# EAGLE board UniversalBoardBreakout (EAGLE 8.5.1)
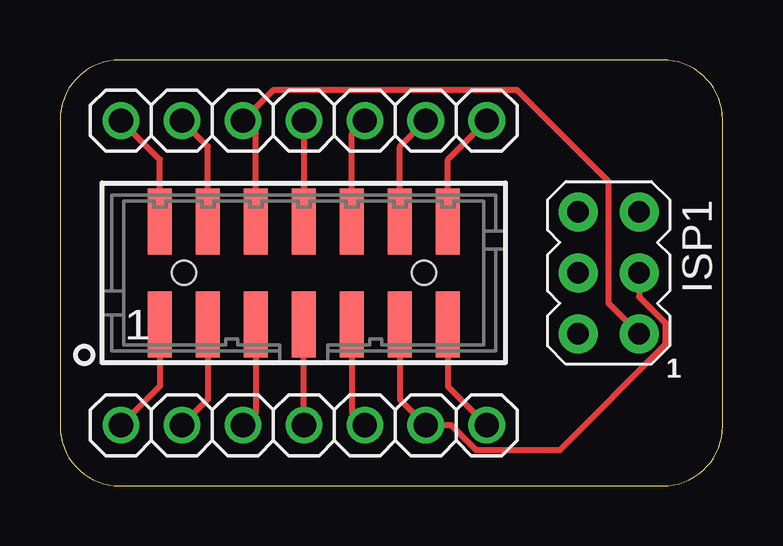
[diagram p0: board, top side]
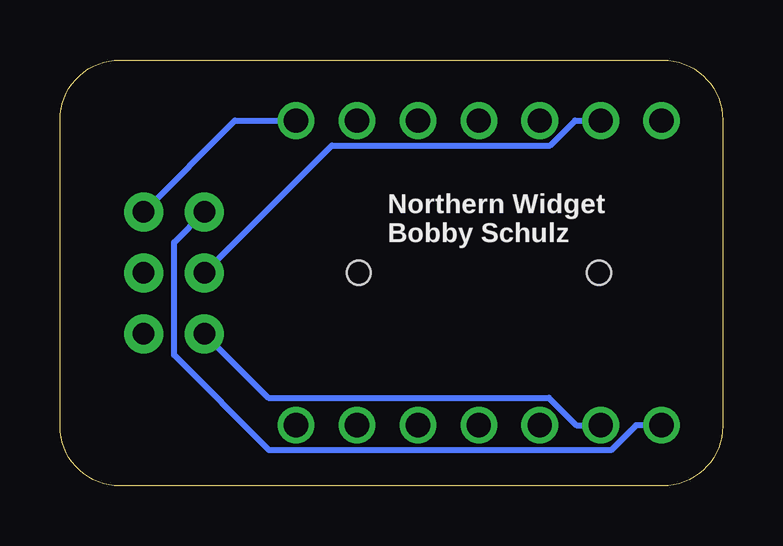
[diagram p1: board, bottom side, seen from below]

Size 27.61 x 17.77 mm. Coordinates in mm from the lower left corner, seen from the top.
Outline: 0,15.27 0,2.5 arc90 2.5,0 25.11,0 arc90 27.61,2.5 27.61,15.27 arc90 25.11,17.77 2.5,17.77 arc90 0,15.27
Copper layers (1*16): Top 0.035559375mm / dielectric 1.6mm / Bottom 0.035559375mm
Design rules "oshpark-2layer": minimum track width 6mil, minimum drill 10mil, track to track 6mil, track to pad 6mil, pad to pad 6mil, via to via 6mil, smd to smd 6mil, copper to edge 15mil, drill to drill 6mil, minimum pad ring 5mil, minimum via ring 5mil, stop-mask expansion 2.5mil, vias tented up to drill 0mil, thermal gap 10mil

## Footprints (pad centres in the part's own frame; a part is rotated, then mirrored left to right if it is on the bottom)
AVRISP = drill 0.9 pad 1.626: 1 -1.27,2.54; 2 1.27,2.54; 3 -1.27,0; 4 1.27,0; 5 -1.27,-2.54; 6 1.27,-2.54
1X07 = drill 1.016: 1 -7.62,0; 2 -5.08,0; 3 -2.54,0; 4 0,0; 5 2.54,0; 6 5.08,0; 7 7.62,0
87832-14 = smd 1 x 2.75: 1 -6,-2.15; 2 -6,2.15; 3 -4,-2.15; 4 -4,2.15; 5 -2,-2.15; 6 -2,2.15; 7 0,-2.15; 8 0,2.15; 9 2,-2.15; 10 2,2.15; 11 4,-2.15; 12 4,2.15; 13 6,-2.15; 14 6,2.15 | hole 1: -5,0; 5,0

## Placement (x,y rotation side)
ISP1  AVRISP-6  [AVRISP]  22.86,8.89 180 top
JP1  [1X07]  10.16,15.24 0 top
JP2  [1X07]  10.16,2.54 180 top
X1  87832-14  [87832-14]  10.16,8.89 0 top

## Library data of the parts
ISP1 JP1 JP2 = bschulz
X1 = bschulz; MF: MOLEX; OC_FARNELL: 7434698; OC_NEWARK: unknown

## Nets
3V3: JP1.1 X1.2
5V: ISP1.2 JP2.6 X1.3
/RESET: ISP1.5 JP1.7 X1.14
ADC5: JP1.6 X1.12
ADC6: JP2.1 X1.13
D1_UNIV: JP2.5 X1.5
GND: ISP1.6 JP2.7 X1.1
MISO: ISP1.1 JP1.3 X1.6
MOSI: JP2.3 X1.9
RX_EXT: JP2.4 X1.7
SCK: JP1.5 X1.10
SCL: ISP1.3 JP2.2 X1.11
SDA: ISP1.4 JP1.2 X1.4
TX_EXT: JP1.4 X1.8

## Tracks (layer width: path | path; a pad name or v marks a point on that pad's centre or on a via)
3V3
  Top 0.254: X1.2 4.16,13.62 JP1.1
5V
  Top 0.254: X1.3 6.16,3.62 JP2.6
  Bottom 0.254: ISP1.2 18.92,3.68 7.24,3.68 6.1,2.54 JP2.6
/RESET
  Top 0.254: X1.14 16.16,13.62 JP1.7
  Bottom 0.254: ISP1.5 20.32,15.24 JP1.7
ADC5
  Top 0.254: X1.12 14.16,14.16 JP1.6
ADC6
  Top 0.254: X1.13 16.16,4.16 JP2.1
D1_UNIV
  Top 0.254: X1.5 8.16,3.08 JP2.5
GND
  Top 0.254: X1.1 4.16,4.16 JP2.7
  Bottom 0.254: JP2.7 3.61,2.54 4.65,1.5 18.9,1.5 22.86,5.46 22.86,10.16 ISP1.6
MISO
  Top 0.254: X1.6 8.16,14.7 JP1.3 8.89,16.51 19.05,16.51 22.86,12.7 22.86,7.62 ISP1.1
MOSI
  Top 0.254: X1.9 12.16,3.08 JP2.3
RX_EXT
  Top 0.254: JP2.4 X1.7
SCK
  Top 0.254: X1.10 12.16,14.7 JP1.5
SCL
  Top 0.254: X1.11 14.16,3.62 JP2.2 16.31,2.54 17.35,1.5 20.82,1.5 25.22,5.9 25.22,6.8 24.13,7.89 ISP1.3
SDA
  Top 0.254: X1.4 6.16,14.16 JP1.2
  Bottom 0.254: ISP1.4 16.28,14.2 7.19,14.2 6.15,15.24 JP1.2
TX_EXT
  Top 0.254: JP1.4 X1.8

## Text on the board
tDocu: Universal / Breakout
_bsilk: Northern Widget / Bobby Schulz